# EAGLE board layout_da_pcb_fusion (EAGLE 9.7.0)
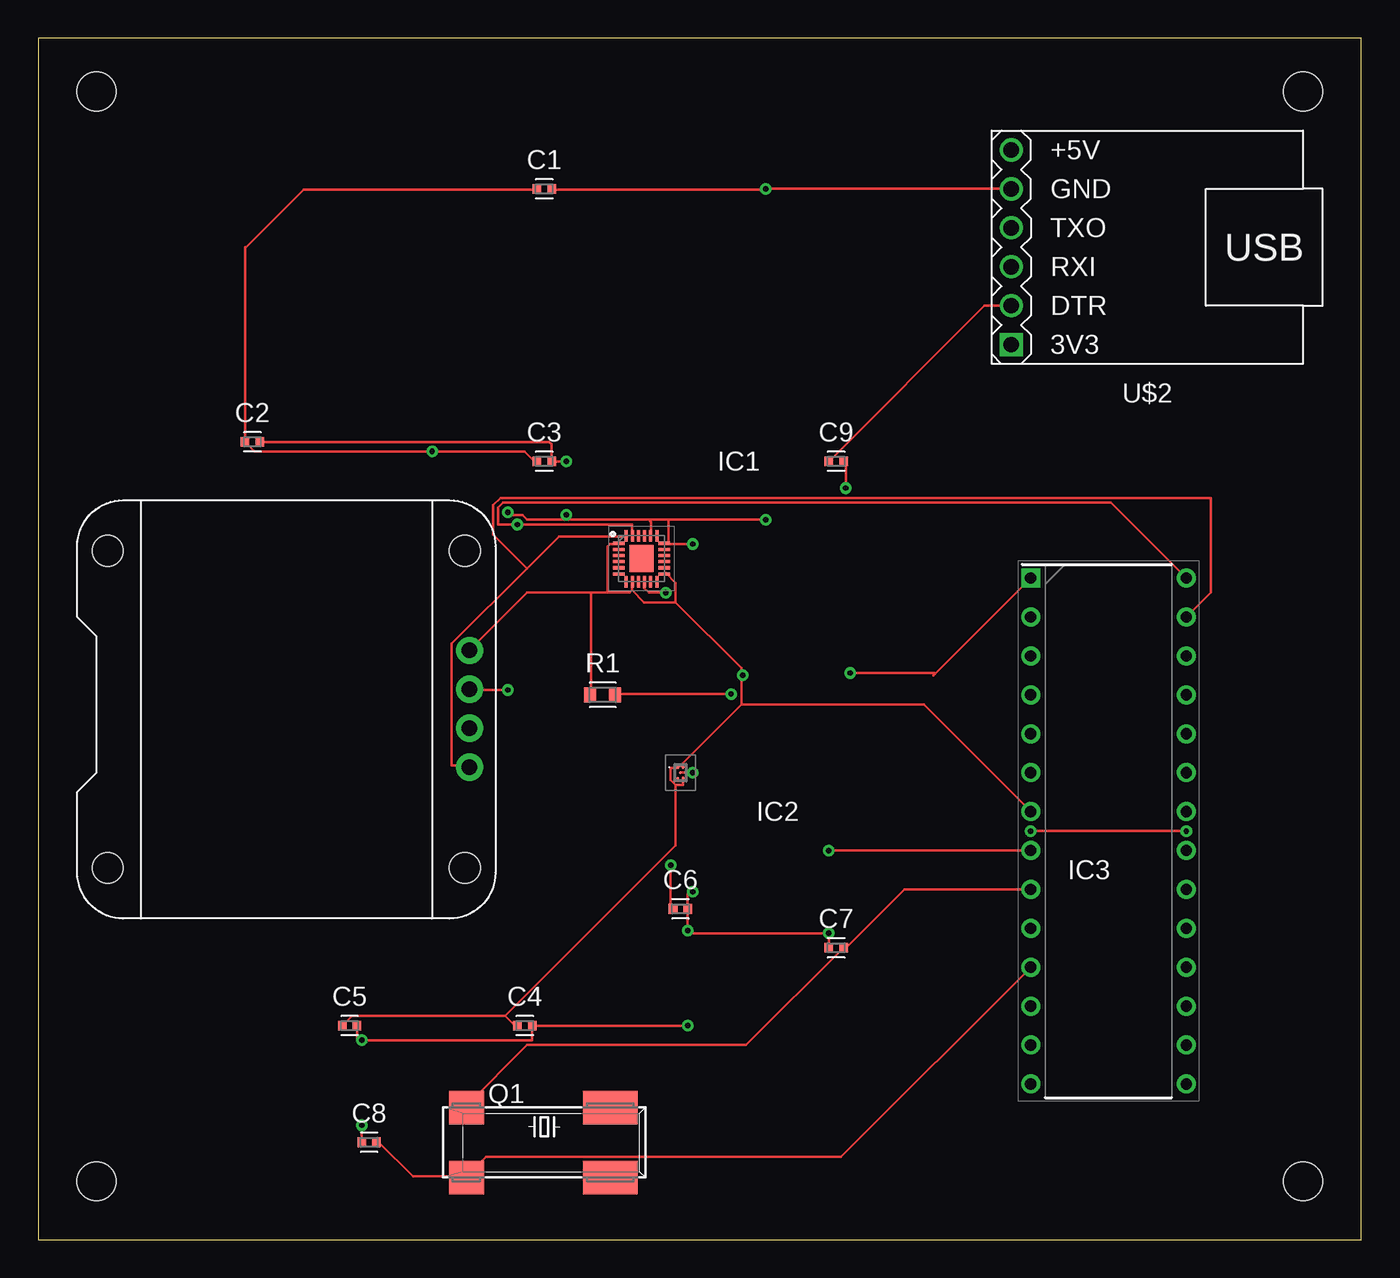
[diagram p0: board, top side]
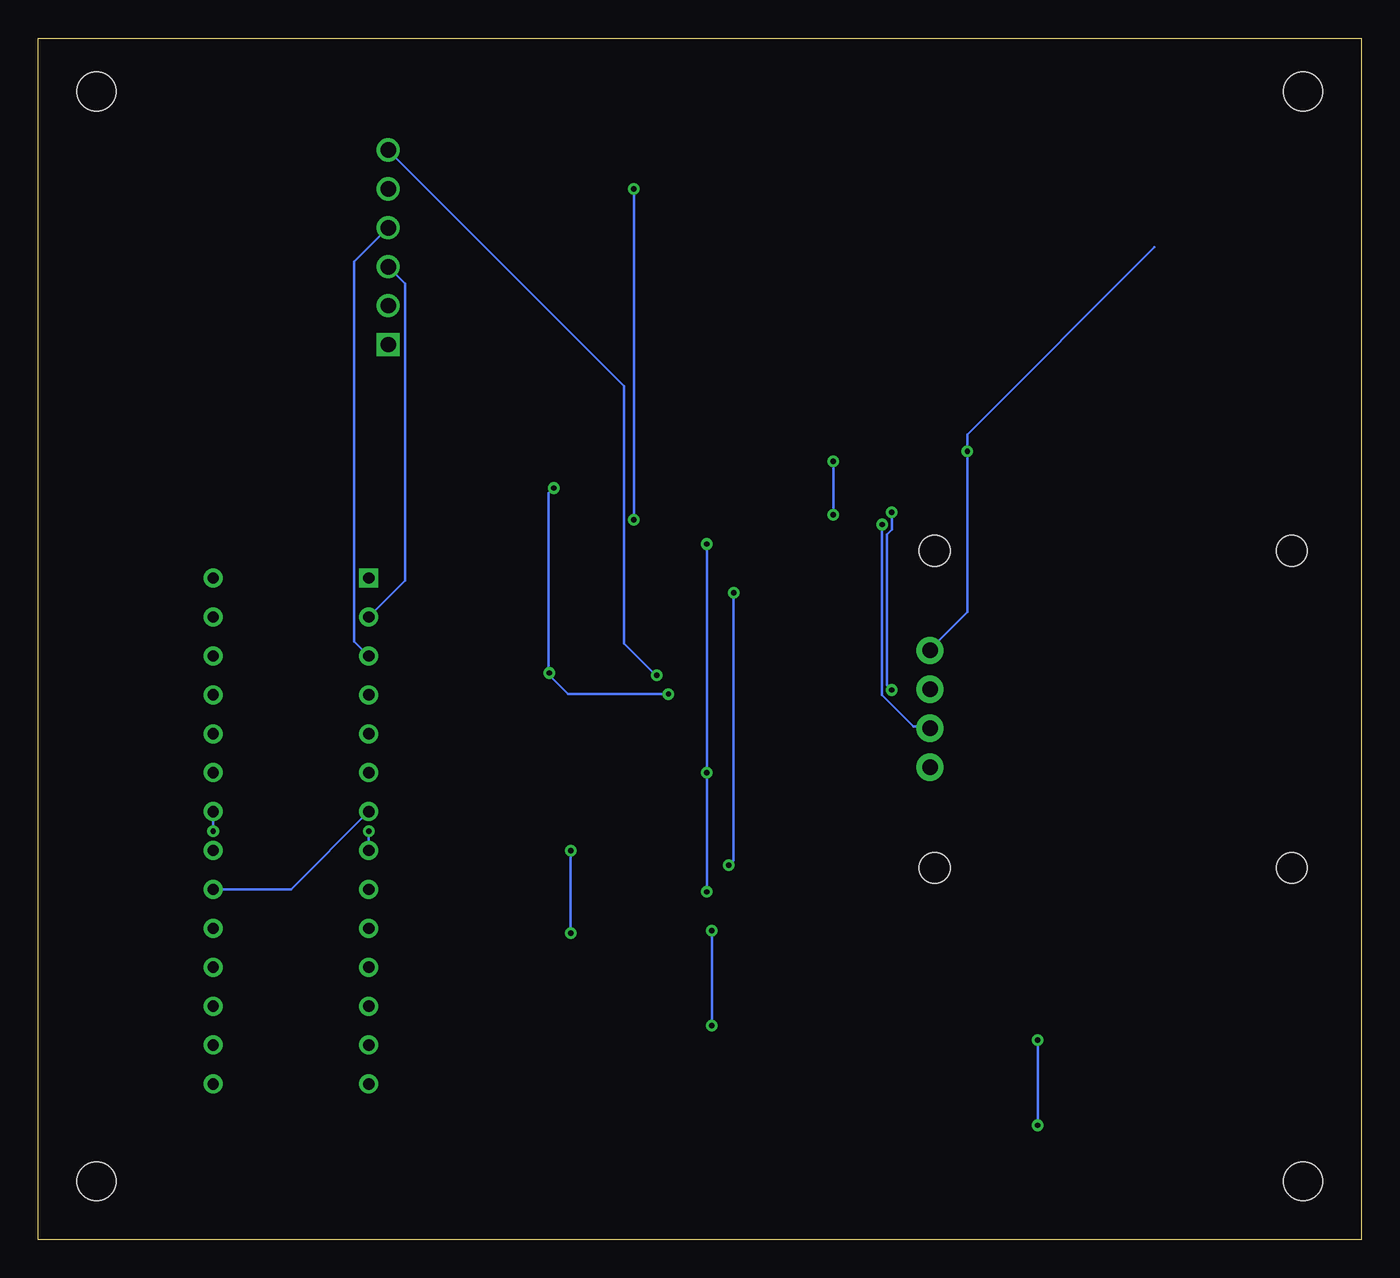
[diagram p1: board, bottom side, seen from below]

Size 86.34 x 78.41 mm. Coordinates in mm from the lower left corner, seen from the top.
Outline: 0,0 86.34,0 86.34,78.41 0,78.41 0,0
Copper layers (1*16): Top 0.035mm / dielectric 1.5mm / Bottom 0.035mm
Design rules "projeto_prototipagem": minimum track width 15mil, minimum drill 0.35mm, track to track 0.21mm, track to pad 0.21mm, pad to pad 0.21mm, via to via 0.21mm, smd to smd 6mil, copper to edge 0.21mm, drill to drill 0.21mm, minimum pad ring 10mil, minimum via ring 8mil, stop-mask expansion 4mil, vias tented up to drill 0mil, thermal gap 0.21mm
Holes 2.54 mm at 3.81,74.93 82.55,74.93 82.55,3.81 3.81,3.81

## Footprints (pad centres in the part's own frame; a part is rotated, then mirrored left to right if it is on the bottom)
CAPC1005X60 = smd 0.56 x 0.629: 1 -0.485,0; 2 0.485,0
QFN40P300X300X105-25N = smd 0.75 x 0.2: 1 -1.5,1; 2 -1.5,0.6; 3 -1.5,0.2; 4 -1.5,-0.2; 5 -1.5,-0.6; 6 -1.5,-1; 13 1.5,-1; 14 1.5,-0.6; 15 1.5,-0.2; 16 1.5,0.2; 17 1.5,0.6; 18 1.5,1 | smd 0.2 x 0.75: 7 -1,-1.5; 8 -0.6,-1.5; 9 -0.2,-1.5; 10 0.2,-1.5; 11 0.6,-1.5; 12 1,-1.5; 19 1,1.5; 20 0.6,1.5; 21 0.2,1.5; 22 -0.2,1.5; 23 -0.6,1.5; 24 -1,1.5 | smd 1.59 x 1.75: 25 0,0
TPS7A1030PYKAR = smd 0.2 x 0.2: A1 -0.175,0.35; A3 0.175,0.35; B2 0,0; C1 -0.175,-0.35; C3 0.175,-0.35
DIP1016W53P254L3468H457Q28N = drill 0.733 pad 1.133 square: 1 -5.08,16.51 | drill 0.733 pad 1.133: 2 -5.08,13.97; 3 -5.08,11.43; 4 -5.08,8.89; 5 -5.08,6.35; 6 -5.08,3.81; 7 -5.08,1.27; 8 -5.08,-1.27; 9 -5.08,-3.81; 10 -5.08,-6.35; 11 -5.08,-8.89; 12 -5.08,-11.43; 13 -5.08,-13.97; 14 -5.08,-16.51; 15 5.08,-16.51; 16 5.08,-13.97; 17 5.08,-11.43; 18 5.08,-8.89; 19 5.08,-6.35; 20 5.08,-3.81; 21 5.08,-1.27; 22 5.08,1.27; 23 5.08,3.81; 24 5.08,6.35; 25 5.08,8.89; 26 5.08,11.43; 27 5.08,13.97; 28 5.08,16.51
86SMX = smd 2.286 x 2.184: 1 -5.08,-2.286; 4 -5.08,2.286 | smd 3.556 x 2.184: 2 4.318,-2.286; 3 4.318,2.286
RESC1608X60 = smd 0.799 x 0.974: 1 -0.815,0; 2 0.815,0
OLED_0.96_I2C = drill 1 pad 1.778: GND -1.63,11.63; SCL 0.91,11.63; SDA 3.45,11.63; VCC -4.17,11.63 | hole 2: -10.67,-11.97; 10.03,-11.97; 10.03,11.33; -10.67,11.33
USB-SERIAL-CP2102 = drill 1 square: 1 8.89,6.35 | drill 1: 2 8.89,3.81; 3 8.89,1.27; 4 8.89,-1.27; 5 8.89,-3.81; 6 8.89,-6.35

## Placement (x,y rotation side)
C1  10 µF  [CAPC1005X60]  33.02,68.58 0 top
C2  0.1µF  [CAPC1005X60]  13.97,52.07 0 top
C3  4.7µF  [CAPC1005X60]  33.02,50.8 0 top
C4  0.01µF  [CAPC1005X60]  31.75,13.97 0 top
C5  0.1µF  [CAPC1005X60]  20.32,13.97 0 top
C6  0.1µF  [CAPC1005X60]  41.91,21.59 0 top
C7  22pF  [CAPC1005X60]  52.07,19.05 0 top
C8  22pF  [CAPC1005X60]  21.59,6.35 0 top
C9  100nF  [CAPC1005X60]  52.07,50.8 0 top
IC1  MPU-9250  [QFN40P300X300X105-25N]  39.37,44.45 0 top
IC2  TPS7A1030PYKAR  [TPS7A1030PYKAR]  41.91,30.48 0 top
IC3  ATMEGA328-PU  [DIP1016W53P254L3468H457Q28N]  69.85,26.67 0 top
Q1  16MHz  [86SMX]  33.02,6.35 0 top
R1  10KΩ  [RESC1608X60]  36.83,35.56 0 top
U$1  OLED_0.96_I2C  [OLED_0.96_I2C]  16.51,34.29 270 top
U$2  USB-SERIAL-CP2102  [USB-SERIAL-CP2102]  72.39,64.77 180 top

## Library data of the parts
C1-C9 = Capacitor; CATEGORY: Capacitor
IC1 = MPU-9250; ARROW_PART_NUMBER: MPU-9250; ARROW_PRICE-STOCK: https://www.arrow.com/en/products/mpu-9250/tdk; DESCRIPTION: Accelerometer, Gyroscope, Magnetometer, 3 Axis Sensor IC, SPI Output; HEIGHT: 1.05mm; MANUFACTURER_NAME: TDK; MANUFACTURER_PART_NUMBER: MPU-9250; MOUSER_PART_NUMBER: 410-MPU-9250; MOUSER_PRICE-STOCK: https://www.mouser.co.uk/ProductDetail/TDK-InvenSense/MPU-9250?qs=u4fy%2FsgLU9OhGjFkQSZssA%3D%3D
IC2 = LDO 3.3v; ARROW_PART_NUMBER: TPS7A1030PYKAR; ARROW_PRICE-STOCK: https://www.arrow.com/en/products/tps7a1030pykar/texas-instruments?region=nac; DESCRIPTION: 300-mA low-IQ ultra-low-dropout (LDO) (70 mV at 300 mA) linear regulator; HEIGHT: mm; MANUFACTURER_NAME: Texas Instruments; MANUFACTURER_PART_NUMBER: TPS7A1030PYKAR; MOUSER_PART_NUMBER: 595-TPS7A1030PYKAR; MOUSER_PRICE-STOCK: https://www.mouser.co.uk/ProductDetail/Texas-Instruments/TPS7A1030PYKAR?qs=gTYE2QTfZfS%252BOiFUcXGdIg%3D%3D
IC3 = ATMEGA328-PU; ARROW_PART_NUMBER: ATMEGA328-PU; ARROW_PRICE-STOCK: https://www.arrow.com/en/products/atmega328-pu/microchip-technology?region=nac; DESCRIPTION: 8-bit Microcontrollers - MCU AVR 32K FLSH 1K EE2K SRAM-20MHz IND; HEIGHT: 4.572mm; MANUFACTURER_NAME: Microchip; MANUFACTURER_PART_NUMBER: ATMEGA328-PU; MOUSER_PART_NUMBER: 556-ATMEGA328-PU; MOUSER_PRICE-STOCK: https://www.mouser.co.uk/ProductDetail/Microchip-Technology-Atmel/ATMEGA328-PU?qs=lwdSMh1%2FoYJT8tfItQpQtA%3D%3D
Q1 = crystal
R1 = Resistor; CATEGORY: Resistor; SUB-CATEGORY: Fixed
U$1 = oled_autodesk
U$2 = USB TO TTL

## Nets
3V3: U$2.1
GND: C1.2 C2.2 C3.2 C4.2 C5.2 C6.2 C7.1 C8.1 IC1.18 IC1.20 IC2.B2 IC3.8 IC3.22 U$1.GND U$2.5
N$1: IC3.2 U$2.3
N$2: IC1.24 IC3.27 U$1.SDA
N$3: IC1.23 IC3.28 U$1.SCL
N$4: IC3.3 U$2.4
N$5: C9.1 U$2.2
N$9: C6.1 IC1.10
N$10: C9.2 IC3.1 R1.2
N$11: C7.2 IC3.9 Q1.4
N$12: C8.2 IC3.11 Q1.1
VCC: C1.1 C2.1 C3.1 C4.1 C5.1 IC1.1 IC1.8 IC1.13 IC2.A1 IC2.A3 IC2.C3 IC3.7 IC3.20 R1.1 U$1.VCC U$2.6

## Tracks (layer width: path | path; a pad name or v marks a point on that pad's centre or on a via)
GND  (via drill 0.35)
  Top 0.152: v21.11,7.46 C8.1 | C5.2 20.8,13.02 v21.11,13.02 32.23,13.02 C4.2 v42.39,13.97 | v64.77,26.67 v74.93,26.67 | v42.7,30.48 IC2.B2 | v42.7,22.7 42.55,22.7 42.39,22.54 C6.2 | C6.2 v42.39,20.16 42.55,20 v51.59,20 C7.1 | C6.2 | v51.59,25.4 IC3.8 | U$2.5 v47.47,68.58 47.35,68.53 33.63,68.53 C1.2 | v34.45,50.8 C3.2 33.5,51.91 33.34,52.07 C2.2 | 34.77,46.99 v34.45,47.31 | 39.85,46.99 34.77,46.99 | 39.85,46.99 40.01,46.83 40.01,46.04 IC1.20 | 40.96,45.4 41.12,45.56 41.12,46.99 | 39.85,46.99 41.12,46.99 | v30.64,35.88 28.26,35.88 U$1.GND | v30.64,47.47 30.8,47.31 31.59,47.31 31.91,46.99 34.77,46.99 | 41.12,46.99 v47.47,46.99 | 40.96,45.4 v42.7,45.4 | 40.96,45.4 IC1.18
  Bottom 0.152: v21.11,7.46 v21.11,13.02 | v74.93,26.67 IC3.22 | IC3.8 v64.77,26.67 | v42.7,22.7 v42.7,30.48 v42.7,45.4 | v51.59,20 v51.59,25.4 | v42.39,20.16 v42.39,13.97 | v34.45,47.31 v34.45,50.8 | v30.64,35.88 30.96,36.19 30.96,46.04 30.64,46.36 v30.64,47.47 | v47.47,46.99 v47.47,68.58
N$1
  Bottom 0.152: IC3.2 62.39,43.02 62.39,62.39 U$2.3
N$2
  Top 0.152: 31.91,43.81 26.99,38.89 26.99,30.96 28.1,30.96 U$1.SDA | 31.91,43.81 33.97,45.88 38.42,45.88 IC1.24 | IC3.27 76.52,42.23 76.52,48.42 30.16,48.42 29.69,47.94 29.69,46.04 31.91,43.81
N$3  (via drill 0.35)
  Top 0.152: IC1.23 38.73,46.04 38.73,46.67 v31.27,46.67 30,46.67 30,47.78 30.32,48.1 70.01,48.1 IC3.28
  Bottom 0.152: v31.27,46.67 31.27,35.56 29.21,33.5 28.26,33.5 U$1.SCL
N$4
  Bottom 0.152: IC3.3 65.72,39.05 65.72,63.82 U$2.4
N$5
  Top 0.152: U$2.2 61.75,60.96 C9.1
N$9  (via drill 0.35)
  Top 0.152: v41.28,24.45 41.28,21.59 C6.1 | v40.96,42.23 39.85,42.23 39.53,42.55 39.53,42.86 IC1.10
  Bottom 0.152: v41.28,24.45 40.96,24.76 v40.96,42.23
N$10  (via drill 0.35)
  Top 0.152: v52.7,49.05 52.7,50.8 C9.2 | 58.42,36.83 58.52,36.93 | 58.52,36.93 IC3.1 | v45.21,35.61 37.74,35.61 R1.2 | v52.98,36.98 58.47,36.98 58.52,36.93
  Bottom 0.152: v52.7,49.05 53.02,48.74 53.02,36.98 | 53.02,36.98 53.02,36.83 52.98,36.83 51.77,35.61 v45.21,35.61 | v52.98,36.98 53.02,36.98
N$11
  Top 0.152: IC3.9 56.52,22.86 52.7,19.05 C7.2 46.2,12.7 31.91,12.7 27.94,8.73 Q1.4
N$12
  Top 0.152: 27.94,4.13 24.45,4.13 22.23,6.35 C8.2 | IC3.11 52.39,5.4 29.21,5.4 27.94,4.13 | 27.94,4.13 Q1.1
VCC  (via drill 0.35)
  Top 0.152: 13.49,64.77 13.49,64.72 | 13.49,64.72 C2.1 | 25.7,51.43 14.13,51.43 C2.1 | 25.7,51.43 31.75,51.43 32.39,50.8 C3.1 | C2.1 | 30.48,14.6 20.48,14.6 C5.1 | 30.48,14.6 31.12,13.97 C4.1 | 37.15,42.23 37.15,45.24 37.31,45.4 37.78,45.4 IC1.1 | 37.15,42.23 38.58,42.23 38.73,42.39 | 38.73,42.39 38.73,42.86 IC1.8 | 41.59,41.59 41.59,42.86 40.96,43.5 IC1.13 | 41.59,41.59 39.53,41.59 38.73,42.39 | 41.91,30.96 41.75,30.8 | 41.91,30.96 42.07,30.8 IC2.A3 | 41.59,29.69 42.07,29.69 42.07,30.16 IC2.C3 | 41.59,29.69 41.28,30 41.28,30.8 41.75,30.8 | 41.75,30.8 IC2.A1 | 45.88,34.92 41.91,30.96 | 45.88,36.83 45.88,34.92 | 41.59,41.59 45.88,37.31 45.88,36.83 | 37.15,42.23 36.07,42.23 | 36.07,42.23 31.91,42.23 28.26,38.58 U$1.VCC | 30.48,14.6 41.59,25.72 41.59,29.69 | IC3.7 57.78,34.92 45.88,34.92 | C1.1 32.41,68.53 17.32,68.53 13.51,64.72 13.49,64.72 | v25.7,51.46 25.7,51.43 | 36.07,42.23 36.07,35.61 R1.1 | v45.97,36.83 45.88,36.83 | 45.82,36.83 45.88,36.83
  Bottom 0.152: IC3.7 69.85,22.86 IC3.20 | U$2.6 48.1,55.72 48.1,38.89 46.04,36.83 v45.97,36.83 | 13.49,64.77 25.72,52.55 25.72,51.46 | 25.72,51.46 25.72,40.96 28.1,38.58 U$1.VCC | v25.7,51.46 25.72,51.46